# Altium PCB VT18-MODEL-B.PcbDoc (part 3 of 3)
Units mil, origin at the board's own origin, x right, y up, seen from the top; angles counter-clockwise.
Board outline 4724.41 x 4645.67 mil, 4 copper layers (Top Layer, Internal Plane 1, Internal Plane 2, Bottom Layer), stack 30.635 mil thick; 246 components, 149 nets, 926 pads, 600 vias.
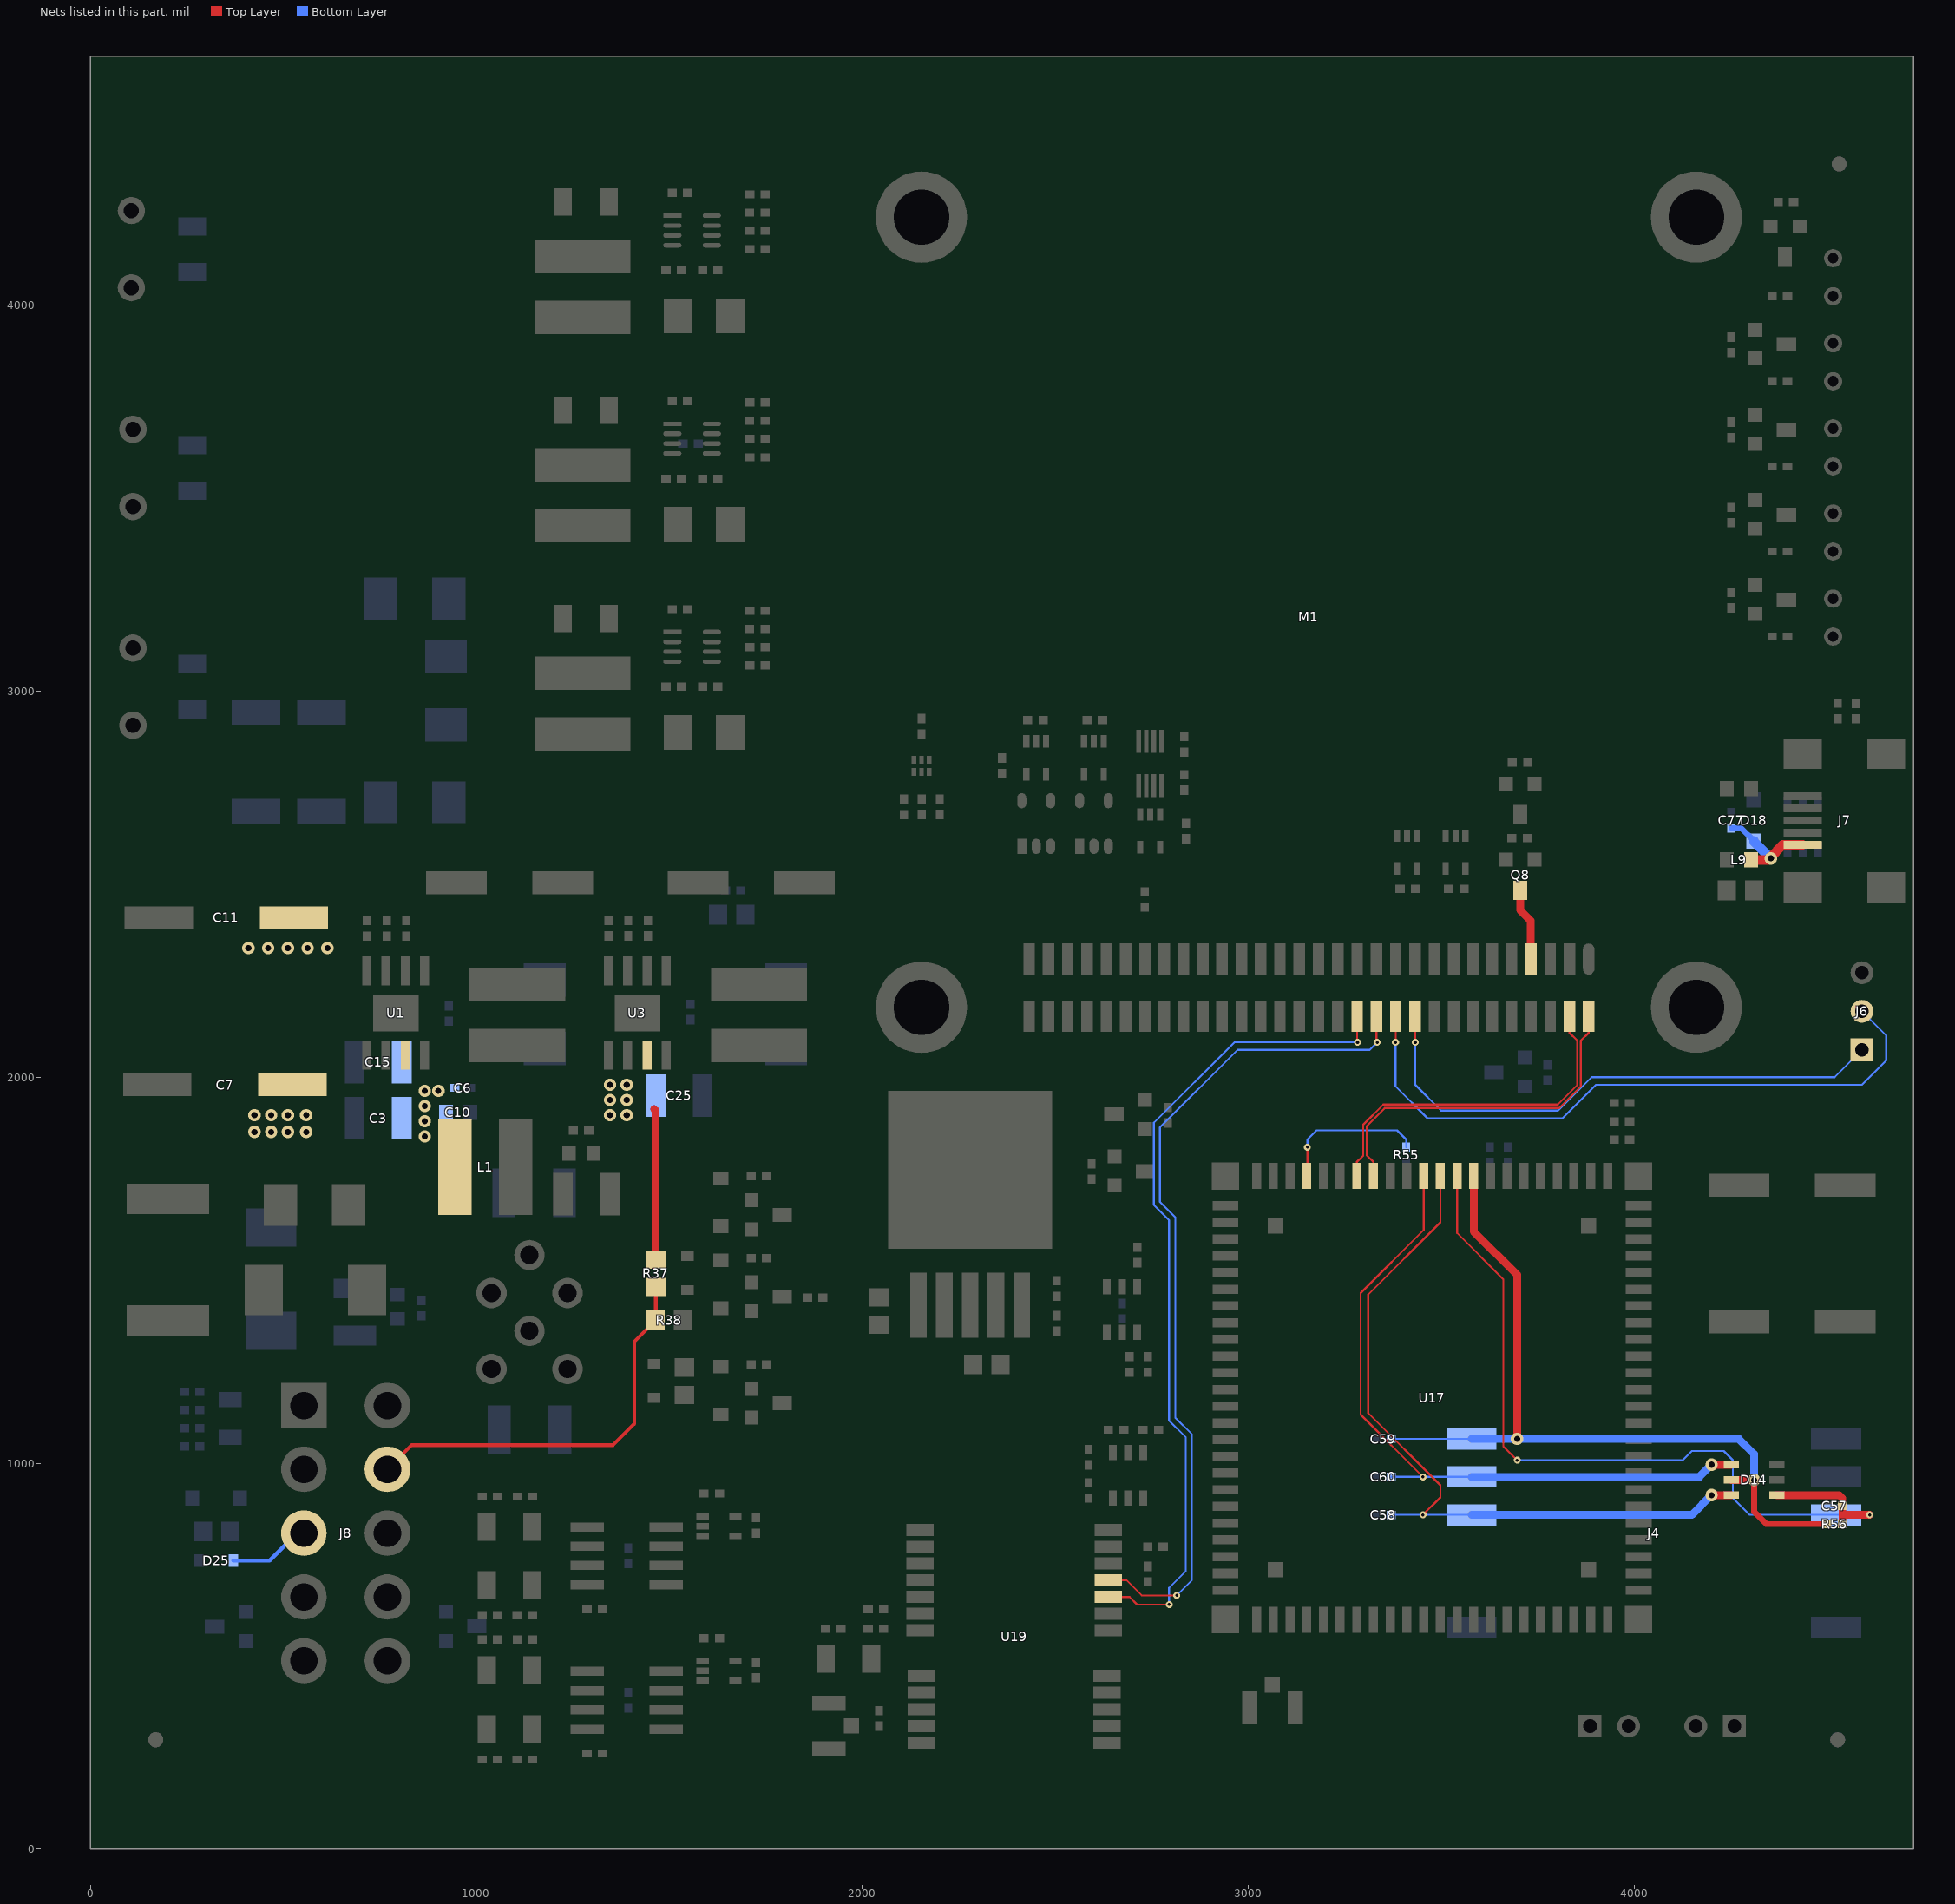
[diagram p5: the nets of this part, all layers, seen from the top]

## Via types
v1: diameter 32, hole 16, Top Layer to Bottom Layer, tented both sides, 365 vias
v2: diameter 18, hole 8, Top Layer to Bottom Layer, tented both sides, 235 vias

## Nets (pads, with @x,y where several pads share a name; then routed paths per layer and width w, separated by ;. In a path a pad name is that pad's centre, name@x,y a point inside that pad or via, vN(x,y) a via of type N, cw(c..) or ccw(c..) an arc to the next point about the centre after c; other vN are vias at no path point) (continued)
SIMCLK: C58.1 D14.6 J4.3 U17.37 | length 1954.3
  Top Layer w5: v2(3452.76,866.14) 3498.03,911.42 3498.03,942.91 3311.02,1129.92 3311.02,1437.01 3498.03,1624.02 U17.37@3498.03,1744.09
  Top Layer w20: v1(4200.79,917.32) D14.6@4251.97,917.32
  Bottom Layer w5: C58.1@3370.52,866.14 J4.3@3578.74,866.14
  Bottom Layer w20: J4.3@3578.74,866.14 4149.61,866.14 v1(4200.79,917.32)
SIMDATA: C57.1 D14.1 J4.6 R56.1 U17.36 | length 2160
  Top Layer w5: U17.36@3541.34,1744.09 3541.34,1596.46 3661.42,1476.38 3661.42,1043.31 v2(3696.85,1007.87)
  Top Layer w20: D14.1@4370.08,917.32 4531.5,917.32 4539.81,909.01 C57.1@4539.81,889.76 4539.81,866.14 ; R56.1@4539.81,842.52 4539.81,866.14 ; v2(4610.24,866.14) 4539.81,866.14
  Bottom Layer w5: v2(3696.85,1007.87) 4125.98,1007.87 4149.61,1031.5 4232.28,1031.5 4255.91,1007.87 4255.91,909.45 4299.21,866.14 J4.6@4523.62,866.14 v2(4610.24,866.14)
SIMRST: C60.1 D14.4 J4.2 U17.38 | length 1811.3
  Top Layer w5: v2@3454.72,966.54 v2(3452.76,964.57) 3291.34,1125.98 3291.34,1440.94 3454.72,1604.33 U17.38@3454.72,1744.09
  Top Layer w20: v1(4200.79,996.06) D14.4@4251.97,996.06
  Bottom Layer w5: C60.1@3370.52,964.57 J4.2@3578.74,964.57
  Bottom Layer w20: J4.2@3578.74,964.57 4169.29,964.57 v1(4200.79,996.06)
SIMVCC: C59.1 D14.5 J4.1 R56.2 U17.35 | length 2094.9
  Top Layer w15: v1(4311.02,956.69) 4311.02,874.02 4342.52,842.52 R56.2@4499.81,842.52
  Top Layer w20: U17.35@3584.65,1744.09 3584.65,1600.39 3696.85,1488.19 v1(3696.85,1062.99) ; D14.5@4251.97,956.69 v1(4311.02,956.69)
  Bottom Layer w5: C59.1@3370.52,1062.99 J4.1@3578.74,1062.99
  Bottom Layer w20: J4.1@3578.74,1062.99 v1(3696.85,1062.99) 4271.65,1062.99 4311.02,1023.62 v1(4311.02,956.69)
UART1-RXD: J6.2 M1.22 | length 1703.9
  Top Layer w5: v2(3381.89,2090.55) 3382.48,2091.14 M1.22@3382.48,2158.47
  Bottom Layer w5: v2(3381.89,2090.55) 3381.89,1976.38 3464.57,1893.7 3814.96,1893.7 3901.57,1980.31 4590.55,1980.31 4653.54,2043.31 4653.54,2107.87 J6.2@4590.55,2170.87
UART1-TXD: J6.1 M1.20 | length 1428.8
  Top Layer w5: M1.20@3432.48,2158.47 3432.48,2091.14 v2(3433.07,2090.55)
  Bottom Layer w5: v2(3433.07,2090.55) 3433.07,1980.31 3500,1913.39 3803.15,1913.39 3889.76,2000 4519.69,2000 J6.1@4590.55,2070.87
UART3-RXD: M1.26 U19.20 | length 2148.2
  Top Layer w5: U19.20@2637.8,653.54 2692.91,653.54 2712.6,633.86 v2(2795.28,633.86) ; M1.26@3282.48,2158.47 3282.48,2091.54 v2(3283.46,2090.55)
  Bottom Layer w5: v2(2795.28,633.86) 2795.28,677.17 2838.58,720.47 2838.58,1066.93 2795.28,1110.24 2795.28,1629.92 2755.91,1669.29 2755.91,1881.89 2964.57,2090.55 v2(3283.46,2090.55)
UART3-TXD: M1.24 U19.21 | length 2179.8
  Top Layer w5: U19.21@2637.8,696.85 2685.04,696.85 2724.41,657.48 v2(2814.96,657.48) ; M1.24@3332.48,2158.47 3332.48,2092.72 v2(3334.65,2090.55)
  Bottom Layer w5: v2(2814.96,657.48) 2854.33,696.85 2854.33,1074.8 2811.02,1118.11 2811.02,1637.8 2771.65,1677.17 2771.65,1870.08 2972.44,2070.87 3314.96,2070.87 v2(3334.65,2090.55)
USB-HOST_N: M1.2 U17.41 | length 924.7
  Top Layer w5.3: U17.41@3324.8,1744.09 3324.8,1780.21 3307.09,1797.93 3307.09,1873.1 3354.12,1920.13 3805.96,1920.13 3861.98,1976.15 3861.98,2094.96 3882.48,2115.46 M1.2@3882.48,2158.47
USB-HOST_P: M1.4 U17.42 | length 924.3
  Top Layer w5.3: U17.42@3281.5,1744.09 3281.5,1780.21 3298.09,1796.8 3298.09,1876.83 3350.39,1929.13 3802.23,1929.13 3852.98,1979.88 3852.98,2094.96 3832.48,2115.46 M1.4@3832.48,2158.47
USB-OTG-VBUS: M1.7 Q8.3 | length 189.6
  Top Layer w20: Q8.3@3704.72,2484.25 3704.72,2433.07 3732.48,2405.32 M1.7@3732.48,2306.1
VBAT: C3.1 C6.1 C7.1 C10.1 C11.1 C15.1 C25.1 L1.2 R37.1 U1.7 U3.7 | length 391.4
  Top Layer w20: 1460.63,1917.32 1464.57,1913.39 R37.1@1464.57,1527.56
  other v1: 866.14,1846.46 425.2,1858.27 468.5,1858.27 511.81,1858.27 559.06,1858.27 866.14,1885.83 425.2,1901.57 468.5,1901.57 511.81,1901.57 559.06,1901.57 1346.46,1901.57 1389.76,1901.57 866.14,1925.2 1346.46,1940.94 1389.76,1940.94 866.14,1964.57 901.57,1964.57 1346.46,1980.31 1389.76,1980.31 409.45,2334.65 460.63,2334.65 511.81,2334.65 562.99,2334.65 614.17,2334.65
VBUSF: C77.2 D18.2 J7.1 L9.2 | length 277.9
  Top Layer w25: L9.2@4303.15,2562.99 v1@4346.46,2562.99 ; v1@4352.36,2568.9 4385.83,2602.36 J7.1@4437.01,2602.36
  Bottom Layer w15: C77.2@4251.97,2645.48 4277.75,2645.48 D18.2@4311.02,2612.2
  Bottom Layer w25: D18.2@4311.02,2612.2 4311.02,2610.24 v1(4354.33,2566.93)
VDDIO-P1V8: R55.2 U17.45 | length 390.3
  Top Layer w5: U17.45@3151.57,1744.09 3153.54,1746.06 v2(3153.54,1818.9)
  Bottom Layer w5: v2(3153.54,1818.9) 3153.54,1838.58 3177.17,1862.2 3385.83,1862.2 3409.45,1838.58 R55.2@3409.45,1819.09
WAKEUP-H: D25.1 J8.5 | length 212.4
  Bottom Layer w10: D25.1@370.08,748.03 464.57,748.03 535.43,818.9 J8.5@553.15,818.9
WAKEUP-L: J8.4 R37.2 R38.1 | length 1065.8
  Top Layer w10: J8.4@769.69,984.25 832.68,1047.24 1354.33,1047.24 1409.45,1102.36 1409.45,1314.96 R38.1@1464.57,1370.08 R37.2@1464.57,1456.69
pads on no net: D14.3 D17.1 D17.5 D17.6 Designator55. Designator56. Designator57. Designator58. Designator59. Designator60. J4. J4.5 J7.4 J8.6 M1. M1.10 M1.28 M1.30 M1.32 M1.33 M1.34 M1.35 M1.36 M1.37 M1.38 M1.39 M1.40 M1.42 M1.43 M1.44 M1.45 M1.46 M1.48 U1.2 U1.5 U3.2 U3.5 U11.1 U13.1 U14.3 U17. U17.2 U17.3 U17.4 U17.5 U17.6 U17.7 U17.8 U17.9 U17.10 U17.11 U17.12 U17.13 U17.15 U17.16 U17.18 U17.19 U17.21 U17.22 U17.23 U17.24 U17.25 U17.32 U17.43 U17.46 U17.47 U17.48 U17.50 U17.51 U17.52 U17.53 U17.54 U17.55 U17.56 U17.57 U17.58 U17.59 U17.60 U17.61 U17.62 U17.63 U17.64 U17.65 U17.66 U17.67 U17.68 U17.69 U17.70 U17.71 U17.72 U17.73 U17.78 U17.79 U17.80 U17.81 U17.82 U17.84 U17.85 U17.86 U17.87 U17.88 U17.89 U17.90 U17.92 U17.94 U17.96 U19.1 U19.2 U19.3 U19.4 U19.5 U19.6 U19.14 U19.15 U19.16 U19.17 U19.18 U19.19

## Polygon pours and split planes (outlines as drawn)
GND on Top Layer "Top Layer-No Net 1" (solid, remove dead copper, pour order 88): 165.35,1031.5 78.74,1031.5 70.87,1031.5 51.18,1011.81 51.18,74.8 51.18,43.31 51.18,39.37 4685.04,39.37 4685.04,2026.34 1970.54,2026.34 1959.95,2015.75 1960.63,2015.07 1959.95,2015.75 1960.63,1905.51 1535.43,1905.51 1496.06,1866.14 1496.06,1429.13 1377.95,1311.02 1216.54,1311.02 1165.35,1259.84 1125.98,1220.47 1125.98,1114.17 1125.98,1059.06 1098.43,1031.5
GND on Top Layer "Top Layer-No Net 1" (solid, remove dead copper, pour order 86): 1251.97,4606.3 1251.97,4326.77 1295.28,4370.08 1515.75,4370.08 1535.43,4350.39 1539.37,4346.46 1539.37,4236.22 1539.37,4110.24 1610.24,4039.37 1614.17,4035.43 1614.17,3968.5 1614.17,3854.33 1566.93,3807.09 1539.37,3779.53 1539.37,3740.16 1539.37,3566.93 1610.24,3496.06 1610.24,3444.88 1610.24,3303.15 1562.99,3255.91 1539.37,3232.28 1539.37,3212.6 1539.37,3047.24 1610.24,2976.38 1610.24,2803.15 1696.85,2716.54 1996.06,2716.54 2062.99,2649.61 2062.99,2551.18 2062.99,2374.02 1917.32,2228.35 1917.32,2015.75 4685.04,2015.75 4685.04,4606.3
GND on Top Layer "Top Layer-No Net 1" (solid, remove dead copper, pour order 85): 1291.34,1881.89 1307.09,1881.89 1322.83,1866.14 1330.71,1858.27 1342.52,1858.27 1413.39,1858.27 1437.01,1834.65 1437.01,1625.98 1425.2,1614.17 1326.77,1614.17 1314.96,1625.98 1314.96,1736.22 1279.53,1771.65 1275.59,1775.59 1275.59,1846.46 1275.59,1874.02 1283.46,1881.89
GND on Top Layer "Top Layer-No Net 1" (solid, remove dead copper, pour order 83): 1803.15,2657.48 1929.13,2657.48 2003.94,2657.48 2023.62,2637.8 2023.62,2377.95 2003.94,2358.27 2000,2358.27 1870.08,2358.27 1736.22,2492.13 1736.22,2570.87 1736.22,2641.73 1751.97,2657.48
GND on Top Layer "Top Layer-No Net 1" (solid, remove dead copper, pour order 81): 1177.17,2657.48 1409.45,2657.48 1425.2,2641.73 1425.2,2539.37 1374.02,2488.19 1366.14,2480.31 1366.14,2429.13 1366.14,2409.45 1350.39,2393.7 1216.54,2393.7 1161.42,2448.82 1106.3,2503.94 1106.3,2598.43 1106.3,2641.73 1122.05,2657.48
GND on Top Layer "Top Layer-No Net 1" (solid, remove dead copper, pour order 80): 196.85,1811.02 110.24,1811.02 74.8,1811.02 55.12,1830.71 47.24,1838.58 43.31,1842.52 43.31,1897.64 43.31,2015.75 43.31,4606.3 165.35,4606.3 1267.72,4606.3 1267.72,4220.47 1255.91,4208.66 1102.36,4208.66 1074.8,4181.1 1074.8,4153.54 1074.8,3846.46 1094.49,3826.77 1114.17,3826.77 1255.91,3826.77 1267.72,3814.96 1267.72,3681.1 1255.91,3669.29 1090.55,3669.29 1074.8,3653.54 1074.8,3303.15 1102.36,3275.59 1255.91,3275.59 1267.72,3263.78 1267.72,3145.67 1255.91,3133.86 1098.43,3133.86 1074.8,3110.24 1074.8,2708.66 1051.18,2685.04 444.88,2685.04 334.65,2574.8 326.77,2566.93 326.77,2271.65 326.77,1842.52 295.28,1811.02
GPS-PWR on Top Layer "Top Layer-No Net 1" (solid, remove dead copper, pour order 77): 2708.66,944.88 2740.16,944.88 2748.03,937.01 2748.03,767.72 2755.91,759.84 2755.91,728.35 2751.97,724.41 2748.03,724.41 2728.35,724.41 2720.47,732.28 2685.04,767.72 2649.61,767.72 2602.36,767.72 2602.36,799.21 2673.23,799.21 2685.04,799.21 2692.91,807.09 2692.91,862.2 2673.23,881.89 2673.23,885.83 2673.23,937.01 2681.1,944.88
VBAT on Top Layer "Top Layer-No Net 1" (solid, remove dead copper, pour order 75): 1433.07,2102.36 1452.76,2102.36 1456.69,2102.36 1460.63,2098.43 1460.63,1996.06 1480.31,1976.38 1480.31,1885.83 1472.44,1877.95 1338.58,1877.95 1322.83,1893.7 1322.83,1992.12 1330.71,2000 1409.45,2000 1421.26,2011.81 1421.26,2074.8 1421.26,2098.43 1425.2,2102.36
VBAT on Top Layer "Top Layer-No Net 1" (solid, remove dead copper, pour order 73): 425.2,2519.69 590.55,2519.69 637.8,2519.69 653.54,2503.94 653.54,2311.02 637.8,2295.28 381.89,2295.28 366.14,2311.02 366.14,2472.44 366.14,2503.94 381.89,2519.69
P8V0 on Top Layer "Top Layer-No Net 1" (solid, remove dead copper, pour order 71): 1047.24,2181.1 1224.41,2181.1 1251.97,2181.1 1263.78,2192.91 1263.78,2303.15 1165.35,2401.57 1157.48,2409.45 1078.74,2488.19 1078.74,2503.94 1078.74,2562.99 1078.74,2614.17 1078.74,2641.73 1062.99,2657.48 1051.18,2657.48 842.52,2657.48 826.77,2641.73 826.77,2637.8 826.77,2468.5 960.63,2334.65 960.63,2299.21 960.63,2200.79 980.31,2181.1
NetC14_1 on Top Layer "Top Layer-No Net 1" (solid, remove dead copper, pour order 69): 858.27,2102.36 893.7,2102.36 937.01,2145.67 940.94,2145.67 1255.91,2145.67 1263.78,2137.8 1263.78,1964.57 1248.03,1948.82 1027.56,1948.82 964.57,2011.81 858.27,2011.81 850.39,2019.68 850.39,2090.55 850.39,2094.49
VBAT on Top Layer "Top Layer-No Net 1" (solid, remove dead copper, pour order 66): 944.88,1594.49 925.2,1594.49 905.51,1594.49 858.27,1641.73 822.83,1677.17 811.02,1688.98 811.02,1755.91 811.02,1775.59 775.59,1811.02 405.51,1811.02 381.89,1834.65 381.89,2031.5 405.51,2055.12 606.3,2055.12 657.48,2003.94 661.42,2000 700.79,2000 744.09,2000 779.53,2000 799.21,2019.69 799.21,2094.49 803.15,2098.43 830.71,2098.43 834.65,2094.49 834.65,2090.55 834.65,2011.81 854.33,1992.13 952.76,1992.13 1000,1944.88 1000,1803.15 1000,1610.24 984.25,1594.49
NetC4_1 on Top Layer "Top Layer-No Net 1" (solid, remove dead copper, pour order 61): 1299.21,1590.55 1299.21,1708.66 1299.21,1728.35 1248.03,1779.53 1248.03,1614.17 1299.21,1562.99
NetC4_1 on Top Layer "Top Layer-No Net 1" (solid, remove dead copper, pour order 59): 1086.61,1921.26 1216.54,1921.26 1244.09,1921.26 1259.84,1905.51 1259.84,1657.48 1342.52,1574.8 1342.52,1417.32 1318.9,1393.7 1212.6,1393.7 1185.04,1421.26 1185.04,1476.38 1185.04,1496.06 1196.85,1507.87 1196.85,1566.93 1161.42,1602.36 1106.3,1602.36 1062.99,1602.36 1035.43,1629.92 1035.43,1905.51 1051.18,1921.26
PGND on Top Layer "Top Layer-No Net 1" (solid, remove dead copper, pour order 55): 830.71,1322.83 1047.24,1322.83 1094.49,1275.59 1094.49,1078.74 1082.68,1066.93 688.98,1066.93 677.17,1078.74 677.17,1303.15 692.91,1318.9 696.85,1322.83
NetC1_1 on Top Layer "Top Layer-No Net 1" (solid, remove dead copper, pour order 54): 657.48,1775.59 736.22,1775.59 759.84,1775.59 775.59,1759.84 775.59,1755.91 775.59,1669.29 885.83,1559.05 1007.87,1559.06 1090.55,1476.38 1094.49,1472.44 1094.49,1448.82 1094.49,1421.26 1059.06,1385.83 1031.5,1358.27 964.57,1358.27 618.11,1358.27 598.43,1377.95 598.43,1759.84 614.17,1775.59
NetD1_1 on Top Layer "Top Layer-No Net 1" (solid, remove dead copper, pour order 53): 157.48,1775.59 480.32,1775.59 500,1775.59 547.24,1775.59 562.99,1759.84 562.99,1374.02 547.24,1358.27 393.7,1358.27 377.95,1374.02 377.95,1444.88 311.02,1511.81 70.87,1511.81 55.12,1527.56 55.12,1759.84 70.87,1775.59
PWRIN on Top Layer "Top Layer-No Net 1" (solid, remove dead copper, pour order 52): 370.08,1322.83 614.17,1322.83 637.8,1299.21 637.8,1078.74 625.98,1066.93 66.93,1066.93 55.12,1078.74 55.12,1425.2 66.93,1437.01 326.77,1437.01 338.58,1425.2 338.58,1421.26 338.58,1354.33
NetC24_1 on Top Layer "Top Layer-No Net 1" (solid, remove dead copper, pour order 58): 1492.13,2102.36 1503.94,2102.36 1531.5,2129.92 1547.24,2145.67 1590.55,2145.67 1870.08,2145.67 1881.89,2133.86 1881.89,1952.76 1870.08,1940.94 1539.37,1940.94 1476.38,2003.94 1476.38,2094.49 1476.38,2098.43 1480.31,2102.36
P8V5 on Top Layer "Top Layer-No Net 1" (solid, remove dead copper, pour order 62): 1649.61,2177.17 1653.54,2177.17 1870.08,2177.17 1881.89,2188.98 1881.89,2311.02 1755.91,2437.01 1708.66,2484.25 1708.66,2539.37 1708.66,2637.8 1688.98,2657.48 1468.5,2657.48 1452.76,2641.73 1452.76,2484.25 1503.94,2433.07 1578.74,2358.27 1578.74,2307.09 1578.74,2192.91 1594.49,2177.17
P5V0 on Top Layer "Top Layer-No Net 1" (solid, remove dead copper, pour order 72): 1279.53,2968.5 1330.71,2968.5 1578.74,2968.5 1582.68,2964.57 1586.61,2960.63 1586.61,2956.69 1586.61,2759.84 1586.61,2748.03 1578.74,2740.16 1110.24,2740.16 1102.36,2748.03 1102.36,2960.63 1110.24,2968.5
MAIN-PWR on Top Layer "Top Layer-No Net 1" (solid, remove dead copper, pour order 78): 1496.06,3137.8 1527.56,3137.8 1535.43,3137.8 1539.37,3133.86 1539.37,3125.98 1535.43,3122.05 1377.95,3122.05 1307.09,3122.05 1299.21,3129.92 1299.21,3259.84 1307.09,3267.72 1437.01,3267.72 1444.88,3259.84 1444.88,3161.42 1444.88,3157.48 1464.57,3137.8
NetC33_1 on Top Layer "Top Layer-No Net 1" (solid, remove dead copper, pour order 82): 1488.19,3110.24 1535.43,3110.24 1539.37,3106.3 1539.37,3098.43 1535.43,3094.49 1480.31,3094.49 1472.44,3086.61 1464.57,3078.74 1464.57,3066.93 1464.57,3051.18 1472.44,3043.31 1484.25,3043.31 1500,3027.56 1500,3003.94 1492.13,2996.06 1110.24,2996.06 1102.36,3003.94 1102.36,3098.43 1110.24,3106.3 1437.01,3106.3 1440.94,3110.24
CORE-PWR on Top Layer "Top Layer-No Net 1" (solid, remove dead copper, pour order 84): 1244.09,3496.06 1570.87,3496.06 1582.68,3484.25 1582.68,3314.96 1570.87,3303.15 1118.11,3303.15 1102.36,3318.9 1102.36,3480.32 1118.11,3496.06
MAIN-PWR on Top Layer "Top Layer-No Net 1" (solid, remove dead copper, pour order 90): 1389.76,3811.02 1437.01,3811.02 1448.82,3799.21 1448.82,3692.91 1464.57,3677.17 1535.43,3677.17 1539.37,3673.23 1539.37,3669.29 1539.37,3661.42 1535.43,3657.48 1307.09,3657.48 1295.28,3669.29 1295.28,3673.23 1295.28,3799.21 1307.09,3811.02
NetC12_1 on Top Layer "Top Layer-No Net 1" (solid, remove dead copper, pour order 91): 1507.87,3649.61 1535.43,3649.61 1539.37,3645.67 1539.37,3637.8 1535.43,3633.86 1472.44,3633.86 1460.63,3622.05 1460.63,3586.61 1468.5,3578.74 1476.38,3570.87 1492.13,3570.87 1496.06,3570.87 1500,3566.93 1500,3527.56 1496.06,3523.62 1118.11,3523.62 1102.36,3539.37 1102.36,3629.92 1114.17,3641.73 1417.32,3641.73 1425.2,3649.61
P3V3 on Top Layer "Top Layer-No Net 1" (solid, remove dead copper, pour order 92): 1275.59,4035.43 1570.87,4035.43 1582.68,4023.62 1582.68,3866.14 1570.87,3854.33 1114.17,3854.33 1102.36,3866.14 1102.36,3870.08 1102.36,4023.62 1114.17,4035.43
MAIN-PWR on Top Layer "Top Layer-No Net 1" (solid, remove dead copper, pour order 93): 1334.65,4346.46 1433.07,4346.46 1448.82,4330.71 1448.82,4255.91 1448.82,4248.03 1480.31,4216.54 1503.94,4216.54 1535.43,4216.54 1539.37,4212.6 1539.37,4200.79 1535.43,4196.85 1307.09,4196.85 1295.28,4208.66 1295.28,4216.54 1295.28,4322.83 1295.28,4334.65 1307.09,4346.46
NetC23_1 on Top Layer "Top Layer-No Net 1" (solid, remove dead copper, pour order 94): 1484.25,4188.98 1535.43,4188.98 1539.37,4185.04 1539.37,4181.1 1539.37,4177.17 1539.37,4173.23 1535.43,4169.29 1476.38,4169.29 1464.57,4157.48 1464.57,4122.05 1472.44,4114.17 1476.38,4110.24 1480.31,4110.24 1492.13,4110.24 1500,4102.36 1500,4070.87 1492.13,4062.99 1118.11,4062.99 1102.36,4078.74 1102.36,4165.35 1118.11,4181.1 1397.64,4181.1 1405.51,4188.98
CORE-PWR on Top Layer "Top Layer-No Net 1" (solid, remove dead copper, pour order 95): 2421.26,2098.43 2492.13,2098.43 2500,2106.3 2500,2484.25 2492.13,2492.13 2421.26,2492.13 2413.39,2484.25 2413.39,2106.3 2421.26,2098.43
P3V3 on Top Layer "Top Layer-No Net 1" (solid, remove dead copper, pour order 96): 2555.12,2098.43 2586.61,2098.43 2590.55,2098.43 2598.43,2106.3 2598.43,2484.25 2590.55,2492.13 2523.62,2492.13 2515.75,2484.25 2515.75,2106.3 2523.62,2098.43
OTG-SH-GND on Top Layer "Top Layer-No Net 1" (solid, remove dead copper, pour order 97): 4468.5,2933.07 4625.98,2933.07 4665.35,2933.07 4685.04,2913.39 4685.04,2417.32 4669.29,2401.57 4421.26,2401.57 4405.51,2417.32 4405.51,2421.26 4405.51,2519.69 4547.24,2519.69 4566.93,2539.37 4566.93,2791.34 4547.24,2811.02 4405.51,2811.02 4405.51,2913.39 4425.2,2933.07
M3V8 on Top Layer "Top Layer-No Net 1" (solid, remove dead copper, pour order 98): 3830.71,1657.48 3948.82,1657.48 3956.69,1665.35 3956.69,1956.69 3948.82,1964.57 3921.26,1964.57 3822.83,1866.14 3822.83,1771.65 3822.83,1665.35
M3V8 on Top Layer "Top Layer-No Net 1" (solid, remove dead copper, pour order 99): 4192.91,1814.96 4338.58,1814.96 4366.14,1814.96 4385.83,1795.28 4385.83,1791.34 4385.83,1299.21 4366.14,1279.53 4177.17,1279.53 4157.48,1299.21 4157.48,1795.28 4177.17,1814.96
P5V0 on Top Layer "Top Layer-No Net 1" (solid, remove dead copper, pour order 100): 2133.86,1511.81 2181.1,1511.81 2224.41,1511.81 2236.22,1500 2236.22,1307.09 2236.22,1173.23 2220.47,1157.48 1980.31,1157.48 1968.5,1169.29 1968.5,1366.14 1976.38,1374.02 2090.55,1374.02 2106.3,1389.76 2106.3,1488.19 2106.3,1500 2118.11,1511.81
P3V8 on Top Layer "Top Layer-No Net 1" (solid, remove dead copper, pour order 101): 2334.65,1511.81 2354.33,1511.81 2366.14,1511.81 2374.02,1503.94 2374.02,1318.9 2393.7,1299.21 2452.76,1299.21 2468.5,1314.96 2468.5,1338.58 2476.38,1346.46 2480.31,1350.39 2484.25,1350.39 2578.74,1350.39 2598.43,1370.08 2625.98,1370.08 2637.8,1370.08 2649.61,1358.27 2649.61,1169.29 2637.8,1157.48 2338.58,1157.48 2326.77,1169.29 2326.77,1291.34 2318.9,1299.21 2318.9,1503.94 2326.77,1511.81
M3V8 on Top Layer "Top Layer-No Net 1" (solid, remove dead copper, pour order 102): 2633.86,1417.32 2661.42,1417.32 2681.1,1417.32 2688.98,1425.2 2688.98,1649.61 2681.1,1657.48 2586.61,1657.48 2574.8,1645.67 2574.8,1570.87 2574.8,1425.2 2582.68,1417.32
GND on Bottom Layer "Top Layer-No Net 1" (solid, remove dead copper, pour order 89): 4685.04,39.37 39.37,39.37 39.37,4606.3 4685.04,4606.3
VBAT on Bottom Layer "Top Layer-No Net 1" (solid, remove dead copper, pour order 76): 1389.76,2023.62 1464.57,2023.62 1500,2023.62 1507.87,2015.75 1507.87,1885.83 1500,1877.95 1496.06,1877.95 1330.71,1877.95 1322.83,1885.83 1322.83,2015.75 1330.71,2023.62
NetC14_1 on Bottom Layer "Top Layer-No Net 1" (solid, remove dead copper, pour order 70): 1110.24,2145.67 1181.1,2145.67 1251.97,2145.67 1263.78,2133.86 1263.78,1964.57 1251.97,1952.76 1078.74,1952.76 1066.93,1964.57 1066.93,2133.86 1078.74,2145.67
VBAT on Bottom Layer "Top Layer-No Net 1" (solid, remove dead copper, pour order 67): 767.72,2102.36 818.9,2102.36 858.27,2102.36 944.88,2015.75 944.88,1976.38 944.88,1881.89 944.88,1834.65 933.07,1822.83 767.72,1822.83 755.91,1834.65 755.91,1929.13 755.91,2090.55
NetC4_1 on Bottom Layer "Top Layer-No Net 1" (solid, remove dead copper, pour order 64): 1192.91,1791.34 1275.59,1791.34 1311.02,1791.34 1326.77,1775.59 1326.77,1409.45 1311.02,1393.7 1212.6,1393.7 1185.04,1421.26 1185.04,1496.06 1196.85,1507.87 1196.85,1566.93 1161.42,1602.36 1153.54,1610.24 1153.54,1614.17 1153.54,1755.91 1153.54,1775.59 1169.29,1791.34
NetC1_1 on Bottom Layer "Top Layer-No Net 1" (solid, remove dead copper, pour order 57): 374.02,1775.59 389.76,1791.34 1102.36,1791.34 1118.11,1775.59 1118.11,1629.92 1090.55,1602.36 1070.87,1582.68 1070.87,1559.06 1070.87,1511.81 1070.87,1484.25 1090.55,1464.57 1090.55,1421.26 1031.5,1362.2 968.5,1362.2 929.13,1401.57 913.39,1417.32 842.52,1417.32 637.8,1417.32 610.24,1417.32 586.61,1440.94 562.99,1464.57 519.68,1464.57 515.75,1464.57 448.82,1464.57 385.83,1464.57 374.02,1476.38
PGND on Bottom Layer "Top Layer-No Net 1" (solid, remove dead copper, pour order 56): 385.83,1433.07 547.24,1433.07 590.55,1389.76 594.49,1385.83 645.67,1385.83 661.42,1385.83 803.15,1385.83 893.7,1385.83 897.64,1385.83 921.26,1362.2 952.76,1330.71 1027.56,1330.71 1106.3,1251.97 1106.3,1003.94 1094.49,992.13 944.88,992.13 889.76,1047.24 870.08,1066.93 748.03,1066.93 716.54,1066.93 704.72,1066.93 669.29,1102.36 665.35,1106.3 665.35,1188.98 665.35,1208.66 629.92,1244.09 385.83,1244.09 374.02,1255.91 374.02,1421.26
NetC24_1 on Bottom Layer "Top Layer-No Net 1" (solid, remove dead copper, pour order 60): 1732.28,2137.8 1834.65,2137.8 1866.14,2137.8 1877.95,2125.98 1877.95,1952.76 1866.14,1940.94 1716.54,1940.94 1704.72,1952.76 1704.72,2125.98 1716.54,2137.8
P8V0 on Bottom Layer "Top Layer-No Net 1" (solid, remove dead copper, pour order 63): 881.89,2799.21 913.39,2799.21 988.19,2799.21 1078.74,2708.66 1078.74,2527.56 1066.93,2515.75 858.27,2515.75 846.46,2527.56 846.46,2787.4 858.27,2799.21
NetD5_2 on Bottom Layer "Top Layer-No Net 1" (solid, remove dead copper, pour order 65): 515.75,2799.21 748.03,2799.21 799.21,2799.21 811.02,2787.4 811.02,2625.98 799.21,2614.17 326.77,2614.17 314.96,2625.98 314.96,2787.4 326.77,2799.21
NetC17_1 on Bottom Layer "Top Layer-No Net 1" (solid, remove dead copper, pour order 68): 90.55,2850.39 381.89,2850.39 791.34,2850.39 811.02,2870.08 811.02,3299.21 795.28,3314.96 688.98,3314.96 673.23,3299.21 673.23,3188.98 503.94,3019.69 346.46,3019.69 74.8,3019.69 62.99,3007.87 62.99,2862.2 74.8,2850.39
P8V5 on Bottom Layer "Top Layer-No Net 1" (solid, remove dead copper, pour order 74): 897.64,2980.31 952.76,2980.31 1007.87,2980.31 1236.22,2751.97 1381.89,2751.97 1460.63,2673.23 1492.13,2673.23 1645.67,2673.23 1669.29,2649.61 1669.29,2543.31 1653.54,2527.56 1653.54,2515.75 1653.54,2421.26 1653.54,2377.95 1641.73,2366.14 1586.61,2366.14 1318.9,2633.86 1185.04,2633.86 1066.93,2751.97 984.25,2834.65 980.31,2834.65 862.2,2834.65 846.46,2850.39 842.52,2854.33 842.52,2968.5 854.33,2980.31
MAIN-PWR on Bottom Layer "Top Layer-No Net 1" (solid, remove dead copper, pour order 79): 921.26,3322.83 992.13,3322.83 1051.18,3322.83 1066.93,3307.09 1066.93,3271.65 1066.93,3129.92 1078.74,3118.11 1283.46,3118.11 1299.21,3133.86 1299.21,3259.84 1307.09,3267.72 1437.01,3267.72 1444.88,3259.84 1444.88,3232.28 1444.88,3027.56 1429.13,3011.81 858.27,3011.81 842.52,3027.56 842.52,3031.5 842.52,3307.09 858.27,3322.83
MAIN-PWR on Bottom Layer "Top Layer-No Net 1" (solid, remove dead copper, pour order 87): 842.52,3307.09 842.52,4157.48 862.2,4177.17 881.89,4177.17 956.69,4177.17 1035.43,4177.17 1275.59,4177.17 1295.28,4196.85 1295.28,4330.71 1311.02,4346.46 1433.07,4346.46 1448.82,4330.71 1448.82,4043.31 1429.13,4023.62 1094.49,4023.62 1070.87,4000 1070.87,3685.04 1094.49,3661.42 1279.53,3661.42 1295.28,3677.17 1295.28,3799.21 1307.09,3811.02 1437.01,3811.02 1448.82,3799.21 1448.82,3547.24 1425.2,3523.62 1114.17,3523.62 1066.93,3476.38 1066.93,3307.09
GND on Internal Plane 1 (split plane): 4684.95,39.45 39.45,39.45 39.45,4606.21 4684.95,4606.21
no net on Internal Plane 2 (split plane): 1983.09,2608.12 1983.09,2391.88 1881.89,2290.67 1881.89,2527.56 1870.08,2527.56 1870.08,2721.14
no net on Internal Plane 2 (split plane): 1963.41,1942.77 1963.41,1868.92 1881.89,1868.92 1881.89,2024.29
no net on Internal Plane 2 (split plane): 1257.07,1807.09 1255.08,1807.09 1255.57,1807.42 1256.68,1809.07 1257.07,1811.02
M3V8 on Internal Plane 2 (split plane): 4313.8,1225.57 3797.39,1225.57 3621.72,1401.24 3620.06,1402.35 3618.11,1402.74 2572.03,1402.74 2572.03,1676 2771.65,1676 2773.6,1676.39 2775.26,1677.5 2776.36,1679.15 2776.75,1681.1 2776.75,1955.53 4313.8,1955.53
P5V0 on Internal Plane 2 (split plane): 2026.4,2980.31 2026.79,2978.36 2027.89,2976.71 2298.05,2706.55 2298.05,2086.61 2298.44,2084.66 2299.54,2083.01 2301.2,2081.9 2303.15,2081.52 2766.56,2081.52 2766.56,2031.5 2766.56,2015.75 2766.56,1960.63 2766.56,1952.76 2766.56,1686.2 2566.93,1686.2 2564.98,1685.81 2563.32,1684.71 2562.22,1683.05 2561.83,1681.1 2561.83,1397.64 2561.83,1146.83 1973.6,1146.83 1973.6,1944.88 1973.21,1946.83 1972.11,1948.49 1886.99,2033.61 1886.99,2281.35 1991.79,2386.16 1992.9,2387.81 1993.29,2389.76 1993.29,2610.24 1992.9,2612.19 1991.79,2613.84 1869.75,2735.89 1868.09,2736.99 1866.14,2737.38 1099.59,2737.38 1099.59,2975.22 1669.29,2975.22 1671.24,2975.61 1672.9,2976.71 1674,2978.36 1674.39,2980.31 1674.39,3136.63 2026.4,3136.63
CORE-PWR on Internal Plane 2 (split plane): 1872.85,3523.62 1873.24,3521.67 1874.35,3520.02 1876,3518.91 1877.95,3518.52 2238.05,3518.52 2244.43,3512.14 2502.78,3253.79 2502.78,2091.71 2308.25,2091.71 2308.25,2708.66 2307.86,2710.61 2306.75,2712.27 2036.59,2982.43 2036.59,3275.59 2036.21,3277.54 2035.1,3279.2 2033.45,3280.3 2031.5,3280.69 1099.59,3280.69 1099.59,3518.52 1653.54,3518.52 1655.49,3518.91 1657.15,3520.02 1658.25,3521.67 1658.64,3523.62 1658.64,3825.61 1872.85,3825.61
no net on Internal Plane 2 (split plane): 1711.44,4060.22 1094.49,4060.22 1092.54,4059.83 1090.88,4058.72 1089.78,4057.07 1089.39,4055.12 1089.39,3830.71 1089.78,3828.76 1090.88,3827.1 1092.54,3826 1094.49,3825.61 1648.45,3825.61 1648.45,3528.72 1094.49,3528.72 1092.54,3528.33 1090.88,3527.23 1089.78,3525.57 1089.39,3523.62 1089.39,3275.59 1089.78,3273.64 1090.88,3271.99 1092.54,3270.88 1094.49,3270.49 2026.4,3270.49 2026.4,3146.83 1669.29,3146.83 1667.34,3146.44 1665.69,3145.34 1664.58,3143.68 1664.19,3141.73 1664.19,2985.41 1094.49,2985.41 1092.54,2985.02 1090.88,2983.92 1089.78,2982.27 1089.39,2980.31 1089.39,2732.28 39.45,2732.28 39.45,4606.21 1711.44,4606.21
P3V3 on Internal Plane 2 (split plane): 4684.95,39.45 1635.02,39.45 1635.02,939.78 1968.5,939.78 1970.45,940.17 1972.11,941.28 1973.21,942.93 1973.6,944.88 1973.6,1136.63 2566.93,1136.63 2568.88,1137.02 2570.53,1138.13 2571.64,1139.78 2572.03,1141.73 2572.03,1392.54 3616,1392.54 3791.67,1216.87 3793.32,1215.76 3795.28,1215.37 4318.9,1215.37 4320.85,1215.76 4322.5,1216.87 4323.61,1218.52 4324,1220.47 4324,1960.63 4323.61,1962.58 4322.5,1964.23 4320.85,1965.34 4318.9,1965.73 2776.75,1965.73 2776.75,2031.5 2776.75,2086.61 2776.36,2088.57 2775.26,2090.22 2773.6,2091.32 2771.65,2091.71 2512.97,2091.71 2512.97,3255.91 2512.58,3257.86 2511.48,3259.51 2243.76,3527.23 2242.11,3528.33 2240.16,3528.72 1883.05,3528.72 1883.05,3830.71 1882.66,3832.66 1881.56,3834.31 1879.9,3835.42 1877.95,3835.81 1099.59,3835.81 1099.59,4050.02 1716.54,4050.02 1718.49,4050.41 1720.14,4051.51 1721.25,4053.17 1721.63,4055.12 1721.63,4606.21 4684.95,4606.21
VBAT on Internal Plane 2 (split plane): 672.07,2114.17 672.46,2112.22 673.56,2110.57 675.21,2109.46 677.17,2109.08 1514.59,2109.08 1514.59,1879.11 1251.97,1879.11 1250.02,1878.73 1248.36,1877.62 1247.26,1875.97 1246.87,1874.02 1246.87,1816.12 343.68,1816.12 343.68,2514.59 672.07,2514.59

## Keep-outs
Keep-Out Layer:
  the board outline again, w10

## Other copper
Top Layer:
  pour cut-out: 2200.79,338.58 2200.79,299.21 2007.87,299.21 1992.13,283.46 1929.13,283.46 1929.13,354.33 1992.13,354.33 2007.87,338.58
  pour cut-out: 3047.24,641.73 3082.68,641.73 3082.68,551.18 3094.49,539.37 3094.49,374.02 3031.5,374.02 3031.5,539.37 3047.24,555.12
Bottom Layer:
  pour cut-out: 1299.21,1818.9 1350.39,1767.72 1350.39,1393.7 1326.77,1370.08 1263.78,1370.08 1133.86,1240.16 1133.86,1000 1102.36,968.5 933.07,968.5 850.39,1051.18 381.89,1051.18 346.46,1086.61 346.46,1791.34 374.02,1818.9
Internal Plane 1 (plane layer: these items are gaps in the copper):
  rectangle: 2106.3,299.21 2200.79,338.58
  rectangle: 3039.37,539.37 3090.55,645.67
Internal Plane 2 (plane layer: these items are gaps in the copper):
  rectangle: 1519.69,1830.71 1881.89,2137.8
  rectangle: 677.17,2114.17 1881.89,2527.56
  rectangle: 338.58,2515.75 1870.08,2732.28
  rectangle: -3.94,1787.4 338.58,2732.28
  rectangle: 1257.07,949.98 1963.41,1868.92
  rectangle: 7.87,15.75 1629.92,1807.09
  rectangle: 2106.3,299.21 2200.79,338.58
  rectangle: 3039.37,539.37 3090.55,645.67
  lines w10: 1464.57,2980.31 1094.49,2980.31 ; 1629.92,0 1629.92,944.88 1968.5,944.88 1968.5,1141.73 ; 1653.54,3830.71 1653.54,3523.62 1094.49,3523.62 1094.49,3275.59 2031.5,3275.59 2031.5,2980.31 2303.15,2708.66 2303.15,2086.61 2381.89,2086.61 2507.87,2086.61 ; 1716.54,4645.67 1716.54,4055.12 1094.49,4055.12 1094.49,3830.71 1877.95,3830.71 1877.95,3523.62 2240.16,3523.62 ; 2031.5,3141.73 1669.29,3141.73 1669.29,2980.31 1094.49,2980.31 ; 2248.03,3515.75 2240.16,3523.62 ; 2287.4,1141.73 2566.93,1141.73 2566.93,1397.64 ; 2303.15,1141.73 1968.5,1141.73 ; 2771.65,1952.76 2771.65,2031.5 ; 2771.65,2015.75 2771.65,2086.61 2507.87,2086.61 ; 1094.49,2980.31 1094.49,2732.28 1866.14,2732.28 1988.19,2610.24 1988.19,2389.76 1881.89,2283.46 1881.89,2031.5 1968.5,1944.88 1968.5,1141.73 ; 2240.16,3523.62 2507.87,3255.91 2507.87,2086.61 ; 2566.93,1397.64 3618.11,1397.64 3795.28,1220.47 4318.9,1220.47 4318.9,1960.63 2771.65,1960.63 2771.65,1681.1 2566.93,1681.1 2566.93,1397.64 ; 338.58,1811.02 338.58,2519.69 677.17,2519.69 677.17,2114.17 1519.69,2114.17 1519.69,1874.02 1251.97,1874.02 1251.97,1811.02 338.58,1811.02

## Silkscreen, mask and mechanical layers (free items; w line width, h text height)
Top Overlay:
  text "GND" at 4484.25,2307.09 h30 r270
  text "RX" at 4484.25,2188.98 h30 r270
  text "TX" at 4484.25,2094.49 h30 r270
  text "DCETVT18B-REV.0" at 2992.13,1909.45 h50
  text "BOOT" at 3834.65,220.47 h30
  text "RESET" at 4110.24,216.54 h30
Top Solder:
  rectangle: 39.37,4488.19 4685.04,4610.24
  rectangle: 39.37,35.43 4685.04,157.48
Bottom Solder:
  rectangle: 39.37,4488.19 4685.04,4610.24
  rectangle: 39.37,35.43 4685.04,157.48
Mechanical 1:
  lines w10: -236.22,157.48 5003.94,157.48 ; -224.41,4488.19 4980.31,4488.19

## Text inside footprints (layer, text, board x,y; h text height)
C17: Top Overlay "+" at 267.72,2893.7 h78.74 r90
C20: Top Overlay "+" at 267.72,3460.63 h78.74 r90
C22: Top Overlay "+" at 263.78,4027.56 h78.74 r90
D13: Top Overlay "+" at 4437.01,4037.4 h27.56 r270
D19: Top Overlay "+" at 4437.01,3155.51 h27.56 r270
D20: Top Overlay "+" at 4437.01,3375.98 h27.56 r270
D21: Top Overlay "+" at 4437.01,3596.46 h27.56 r270
D22: Top Overlay "+" at 4437.01,3816.93 h27.56 r270